# EAGLE board pcb_univ_3-2-(3-4)-x-rev1 (EAGLE 5.11)
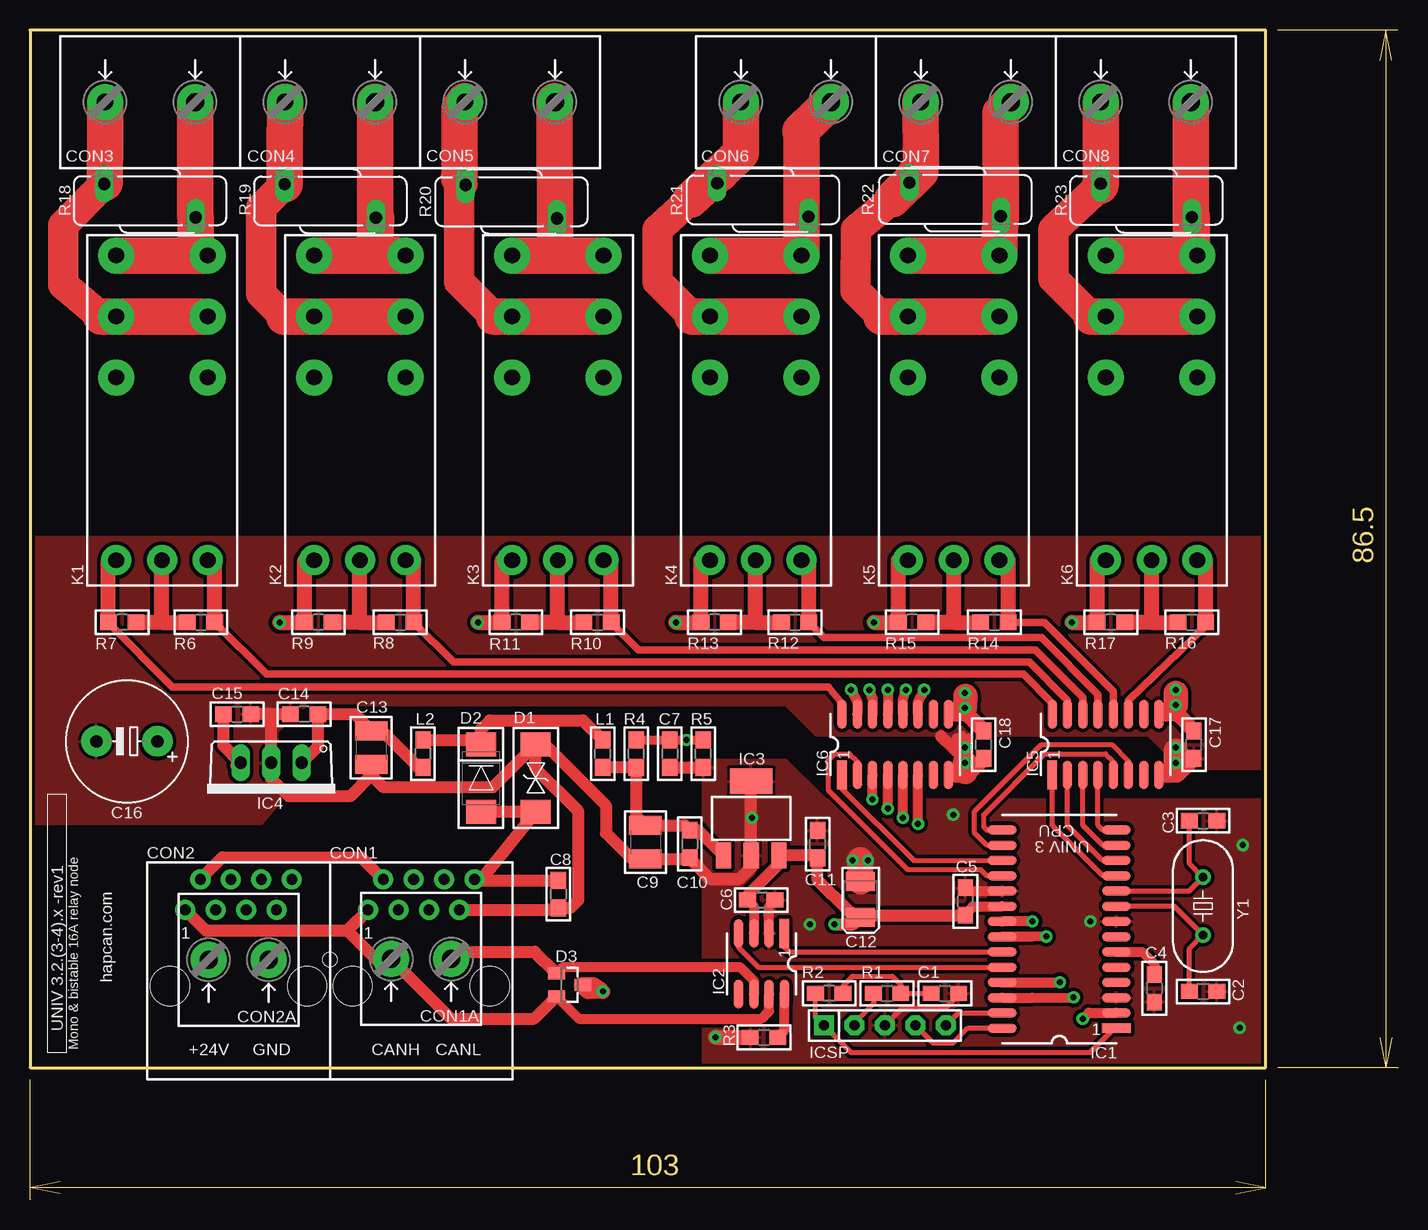
[diagram p0: board, top side]
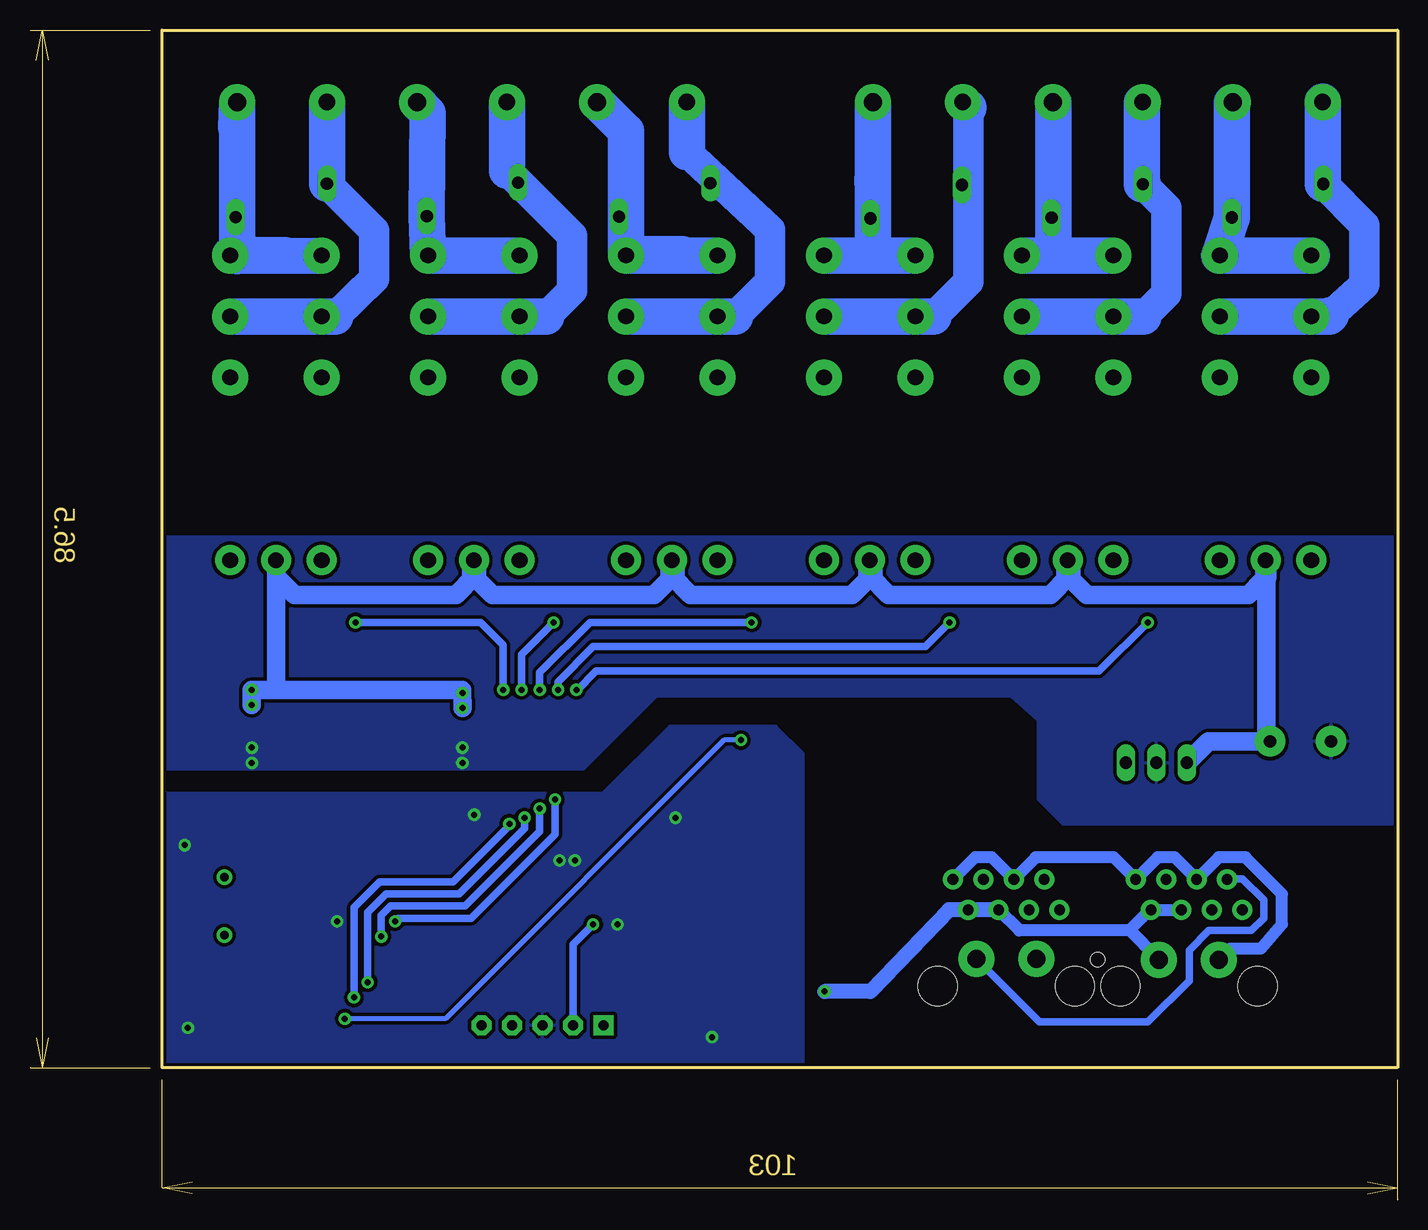
[diagram p1: board, bottom side, seen from below]

Size 114 x 97.5 mm. Coordinates in mm from the lower left corner, seen from the top.
Outline: 113.99,11 114,11 113,11
Outline: 113,11 104,11
Outline: 113,97.5 113,11
Outline: 114,97.5 113,97.5
Outline: 113,97.5 104,97.5
Outline: 113.5,95 113,97.5
Outline: 112.5,13.5 113,11
Outline: 113,97.5 112.5,95
Outline: 113.5,13.5 113,11
Outline: 0,0.01 0,0 0,1
Outline: 0,1 0,10
Outline: 103,1 0,1
Outline: 103,1 103,10
Outline: 100.5,0.5 103,1
Outline: 2.5,1.5 0,1
Outline: 103,1 100.5,1.5
Outline: 2.5,0.5 0,1
Outline: 0,11 103,11 103,97.5 0,97.5 0,11
Copper layers (1*16): Top 0.035mm / dielectric 1.5mm / Bottom 0.035mm
Design rules "hapcan_drc *": minimum track width 10mil, minimum drill 0.5mm, track to track 12mil, track to pad 12mil, pad to pad 12mil, via to via 12mil, smd to smd 10mil, copper to edge 10mil, drill to drill 8mil, minimum pad ring 10mil, minimum via ring 10mil, stop-mask expansion 4mil, vias tented up to drill 0mil, thermal gap 10mil
Holes 1.2 mm at 25,20
tKeepout: 4 lines

## Footprints (pad centres in the part's own frame; a part is rotated, then mirrored left to right if it is on the bottom)
0805 = smd 1.397 x 1.27: 1 -1.143,0; 2 1.143,0
1210 = smd 1.6 x 2.7: 1 -1.4,0; 2 1.4,0
SMC_B = smd 1.6 x 2.4: + -1.5,0; - 1.5,0
CAP-5X10.5 = drill 1.016 pad 2.54 round: + -2.54,0; - 2.54,0
RJ45-PCB-SOCKET = drill 0.889 pad 1.676 round: 1 -4.445,6.35; 2 -3.175,8.89; 3 -1.905,6.35; 4 -0.635,8.89; 5 0.635,6.35; 6 1.905,8.89; 7 3.175,6.35; 8 4.445,8.89 | hole 3.251: -5.715,0; 5.715,0
ARK2-5X10,5MM = drill 1.5 pad 3 round: 1 -2.5,0; 2 2.5,0
ARK2-7.5X10.5MM = drill 1.4 pad 3 round: 1 -3.75,0 | drill 1.5 pad 3 round: 2 3.75,0
DO-214_TRANSIL2@1 = smd 2 x 2.5: A 2.82,0; C -2.82,0
DO-214 = smd 2 x 2.5: A 2.82,0; C -2.82,0
SOT-23 = smd 1 x 1.4: 1 -0.95,-1.1; 2 0.95,-1.1; 3 0,1.1
UNIV3CPU = smd 2.4 x 0.8: 1 -4.763,8.255; 2 -4.763,6.985; 3 -4.763,5.715; 4 -4.763,4.445; 5 -4.763,3.175; 6 -4.763,1.905; 7 -4.763,0.635; 8 -4.763,-0.635; 9 -4.763,-1.905; 10 -4.763,-3.175; 11 -4.763,-4.445; 12 -4.763,-5.715; 13 -4.763,-6.985; 14 -4.763,-8.255; 15 4.763,-8.255; 16 4.763,-6.985; 17 4.763,-5.715; 18 4.763,-4.445; 19 4.763,-3.175; 20 4.763,-1.905; 21 4.763,-0.635; 22 4.763,0.635; 23 4.763,1.905; 24 4.763,3.175; 25 4.763,4.445; 26 4.763,5.715; 27 4.763,6.985; 28 4.763,8.255
SO-08 = smd 2.4 x 0.8: 1 -2.54,1.905; 2 -2.54,0.635; 3 -2.54,-0.635; 4 -2.54,-1.905; 5 2.54,-1.905; 6 2.54,-0.635; 7 2.54,0.635; 8 2.54,1.905
SOT-223 = smd 1.27 x 2.159: 1 -2.311,-3.099; 2 0,-3.099; 3 2.311,-3.099 | smd 3.556 x 2.159: 4 0,3.099
TO220V = drill 1.016 long: 1 -2.54,-2.54; 2 0,-2.54; 3 2.54,-2.54
SO-16 = smd 2.4 x 0.8: 1 -2.54,4.445; 2 -2.54,3.175; 3 -2.54,1.905; 4 -2.54,0.635; 5 -2.54,-0.635; 6 -2.54,-1.905; 7 -2.54,-3.175; 8 -2.54,-4.445; 9 2.54,-4.445; 10 2.54,-3.175; 11 2.54,-1.905; 12 2.54,-0.635; 13 2.54,0.635; 14 2.54,1.905; 15 2.54,3.175; 16 2.54,4.445
SIP-5 = drill 0.813 pad 1.676 square: 1 -5.08,0 | drill 0.813 pad 1.676 octagon: 2 -2.54,0; 3 0,0; 4 2.54,0; 5 5.08,0
RELAY_RT = drill 1.3 pad 3 round: 11A 7.62,3.81; 11B 7.62,-3.81; 12A 2.54,3.81; 12B 2.54,-3.81; 14A 12.7,3.81; 14B 12.7,-3.81 | drill 1.3 pad 2.5 round: A1 -12.7,-3.81; A2 -12.7,3.81; A3 -12.7,0
S10K = drill 1.016 long: 1 -1.397,-3.81; 2 1.397,3.81
HC49/S = drill 0.7 pad 1.27 round: 1 -2.413,0; 2 2.413,0

## Placement (x,y rotation side)
C1  100n  [0805]  76.27,17.19 0 top
C2  22p  [0805]  97.79,17.35 0 top
C3  22p  [0805]  97.79,31.57 0 top
C4  10u/6V  [0805]  93.73,17.6 270 top
C5  100n  [0805]  77.98,24.85 90 top
C6  100n  [0805]  60.96,24.97 0 top
C7  100n  [0805]  53.34,37.16 270 top
C8  100n  [0805]  44.04,25.47 270 top
C9  10u/50V  [1210]  51.31,29.8 270 top
C10  100n  [0805]  55,29.65 270 top
C11  100n  [0805]  65.66,29.62 90 top
C12  10u/6V  [SMC_B]  69.24,25.02 90 top
C13  10u/50V  [1210]  28.45,37.67 270 top
C14  100n  [0805]  22.86,40.46 180 top
C15  100n  [0805]  17.27,40.46 0 top
C16  1000u/16V  [CAP-5X10.5]  8.08,38.19 180 top
C17  100n  [0805]  97.03,37.92 90 top
C18  100n  [0805]  79.5,37.92 90 top
CON1  [RJ45-PCB-SOCKET]  32.62,17.8 0 top
CON1A  TERMINAL-2  [ARK2-5X10,5MM]  32.62,20.06 180 top
CON2  [RJ45-PCB-SOCKET]  17.38,17.8 0 top
CON2A  TERMINAL-2  [ARK2-5X10,5MM]  17.38,19.99 180 top
CON3  TERMINAL-2  [ARK2-7.5X10.5MM]  10,91.5 0 top
CON4  TERMINAL-2  [ARK2-7.5X10.5MM]  25,91.5 0 top
CON5  TERMINAL-2  [ARK2-7.5X10.5MM]  40,91.5 0 top
CON6  TERMINAL-2  [ARK2-7.5X10.5MM]  63,91.5 0 top
CON7  TERMINAL-2  [ARK2-7.5X10.5MM]  78,91.5 0 top
CON8  TERMINAL-2  [ARK2-7.5X10.5MM]  93,91.5 0 top
D1  P6SMB33CA  [DO-214_TRANSIL2@1]  42.16,35.13 270 top
D2  S1D  [DO-214]  37.59,35.13 270 top
D3  PESD2CAN  [SOT-23]  44.98,17.9 270 top
IC1  UNIV 3 (CPU)  [UNIV3CPU]  85.81,22.54 180 top
IC2  MCP2551  [SO-08]  60.98,19.66 270 top
IC3  MCP1790-5002EDB  [SOT-223]  60.12,31.77 0 top
IC4  7812  [TO220V]  20.09,33.87 180 top
IC5  ULN2003  [SO-16]  89.66,37.92 90 top
IC6  ULN2003  [SO-16]  72.14,37.92 90 top
ICSP  [SIP-5]  71.27,14.52 0 top
K1  [RELAY_RT]  11,66 90 top
K2  [RELAY_RT]  27.5,66 90 top
K3  [RELAY_RT]  44,66 90 top
K4  [RELAY_RT]  60.5,66 90 top
K5  [RELAY_RT]  77,66 90 top
K6  [RELAY_RT]  93.5,66 90 top
L1  BLM21A102SPT  [0805]  47.75,37.16 90 top
L2  BLM21A102SPT  [0805]  32.77,37.16 90 top
R1  10k  [0805]  71.45,17.19 0 top
R2  470R  [0805]  66.62,17.19 180 top
R3  4k7  [0805]  61.19,13.52 0 top
R4  51k 1%  [0805]  50.55,37.16 90 top
R5  10k 1%  [0805]  56.13,37.16 90 top
R6  75R  [0805]  14.26,48.12 0 top
R7  75R  [0805]  7.68,48.12 180 top
R8  75R  [0805]  30.85,48.12 0 top
R9  75R  [0805]  24.04,48.12 180 top
R10  75R  [0805]  47.31,48.12 0 top
R11  75R  [0805]  40.5,48.12 180 top
R12  75R  [0805]  63.78,48.12 0 top
R13  75R  [0805]  57.07,48.12 180 top
R14  75R  [0805]  80.4,48.12 0 top
R15  75R  [0805]  73.54,48.12 180 top
R16  75R  [0805]  96.86,48.12 0 top
R17  75R  [0805]  90.11,48.12 180 top
R18  VAR10-250  [S10K]  10,83.27 270 top
R19  VAR10-250  [S10K]  25.03,83.24 270 top
R20  VAR10-250  [S10K]  40.12,83.19 270 top
R21  VAR10-250  [S10K]  61.1,83.34 270 top
R22  VAR10-250  [S10K]  77.11,83.39 270 top
R23  VAR10-250  [S10K]  93.05,83.29 270 top
Y1  8MHz  [HC49/S]  97.79,24.46 90 top

## Library data of the parts
C1-C18 CON1 CON1A CON2 CON2A CON3-CON8 D1-D3 IC1-IC6 ICSP K1-K6 L1 L2 R1-R23 Y1 = HAPCAN_devices - UNIV3

## Nets
+5V: C5.1 C6.1 C11.1 C12.+ IC1.20 IC2.3 IC3.3 ICSP.2 R1.1
+12V: C15.1 C16.+ C17.2 C18.2 IC4.3 IC5.9 IC6.9 K1.A3 K2.A3 K3.A3 K4.A3 K5.A3 K6.A3 R6.1 R7.1 R8.1 R9.1 R10.1 R11.1 R12.1 R13.1 R14.1 R15.1 R16.1 R17.1
GND: C1.2 C2.2 C3.2 C4.2 C5.2 C6.2 C7.2 C8.2 C9.2 C10.2 C11.2 C12.- C13.2 C14.2 C15.2 C16.- C17.1 C18.1 CON1.5 CON1.7 CON2.5 CON2.7 CON2A.1 D1.C D3.3 IC1.3 IC1.8 IC1.19 IC2.2 IC3.2 IC3.4 IC4.2 IC5.8 IC6.8 ICSP.3 R3.1 R5.1
K1A1: IC5.16 K1.A1 R6.2
K1A2: IC6.16 K1.A2 R7.2
K2A1: IC5.15 K2.A1 R8.2
K2A2: IC6.15 K2.A2 R9.2
K3A1: IC5.14 K3.A1 R10.2
K3A2: IC6.14 K3.A2 R11.2
K4A1: IC5.13 K4.A1 R12.2
K4A2: IC6.13 K4.A2 R13.2
K5A1: IC5.12 K5.A1 R14.2
K5A2: IC6.12 K5.A2 R15.2
K6A1: IC5.11 K6.A1 R16.2
K6A2: IC6.11 K6.A2 R17.2
N$1: D2.C L1.2 L2.2
N$2: IC1.24 IC2.4
N$3: IC1.23 IC2.1
N$4: CON1.1 CON1A.2 CON2.1 D3.2 IC2.7
N$5: C9.1 C10.1 IC3.1 L1.1 R4.1
N$6: C13.1 C14.1 IC4.1 L2.1
N$7: C1.1 R1.2 R2.1
N$8: IC1.1 ICSP.1 R2.2
N$9: C8.1 CON1.4 CON1.8 CON2.4 CON2.8 CON2A.2 D1.A D2.A
N$10: IC1.28 ICSP.4
N$11: IC1.12 IC5.2
N$12: IC2.8 R3.2
N$14: IC1.27 ICSP.5
N$15: C3.1 IC1.10 Y1.2
N$16: C7.1 IC1.2 R4.2 R5.2
N$18: IC1.11 IC5.1
N$19: IC1.13 IC5.3
N$22: IC1.14 IC5.4
N$24: IC1.15 IC5.5
N$27: CON1.2 CON1A.1 CON2.2 D3.1 IC2.6
N$30: CON3.1 K1.11A K1.11B R18.1
N$32: CON3.2 K1.14A K1.14B R18.2
N$40: C2.1 IC1.9 Y1.1
N$45: IC1.16 IC5.6
N$46: IC1.17 IC6.1
N$47: IC1.18 IC6.2
N$51: CON4.2 K2.14A K2.14B R19.2
N$52: CON5.2 K3.14A K3.14B R20.2
N$53: CON6.2 K4.14A K4.14B R21.2
N$54: CON7.2 K5.14A K5.14B R22.2
N$55: CON8.2 K6.14A K6.14B R23.2
N$56: C4.1 IC1.6
N$57: CON4.1 K2.11A K2.11B R19.1
N$58: CON5.1 K3.11A K3.11B R20.1
N$59: CON6.1 K4.11A K4.11B R21.1
N$60: CON7.1 K5.11A K5.11B R22.1
N$61: CON8.1 K6.11A K6.11B R23.1
N$63: IC1.21 IC6.3
N$64: IC1.22 IC6.4
N$65: IC1.25 IC6.5
N$66: IC1.26 IC6.6

## Tracks (layer width: path | path; a pad name or v marks a point on that pad's centre or on a via)
+5V  (via drill 0.5 pad 1.02)
  Top 0.406: ICSP.2 68.73,14.7 70.36,16.33 70.36,17.13 R1.1
  Top 0.813: IC1.20 78.59,24.44 C5.1 | IC2.3 60.34,24.45 C6.1
  Top 1.016: C12.+ 69.81,23.71 C5.1 | C6.1 59.82,25.35 62.43,27.96 IC3.3 65.46,28.68 C11.1 65.66,26.62 68.26,24.02 C12.+ | C12.+ 68.66,22.94 v67.06,22.94
  Bottom 0.61: v67.06,22.94 68.73,21.27 ICSP.2
+12V  (via drill 0.5 pad 1.02)
  Top 0.61: 94.74,40.46 IC5.9 | 77.22,40.46 IC6.9 | 78.11,40.46 77.98,40.59 v77.95,40.97 | v95.5,41.23 95.5,40.46 | v77.95,42.24 77.95,42.01 77.98,41.99
  Top 1.016: IC4.3 16.13,37.84 C15.1
  Top 1.27: 10.92,48.12 R7.1 | 10.92,48.12 R6.1 | 27.43,48.12 R9.1 | 27.43,48.12 R8.1 | 43.94,48.12 R11.1 | 43.94,48.12 R10.1 | 60.45,48.12 R13.1 | 60.45,48.12 R12.1 | 76.96,48.12 R15.1 | 76.96,48.12 R14.1 | 93.47,48.12 R17.1 | 93.47,48.12 R16.1 | K6.A3 93.47,53.3 93.47,48.12 | K5.A3 76.96,53.3 76.96,48.12 | K4.A3 60.45,53.3 60.45,48.12 | K3.A3 43.94,53.3 43.94,48.12 | K2.A3 27.43,53.3 27.43,48.12 | K1.A3 10.92,53.3 10.92,48.12 | C17.2 95.63,40.46 95.5,40.46 94.74,40.46 | C18.2 78.11,40.46 77.22,40.46 | IC4.3 17.31,36.17
  Top 2.032: v95.5,41.23 95.5,42.24 | v77.95,40.97 77.98,41.99
  Bottom 1.27: 10.92,51.93 11.18,51.67
  Bottom 1.524: v77.95,40.97 77.98,42.5 91.44,42.5 | v95.5,42.5 v95.5,41.23 | 93.47,42.5 v95.5,42.5 | 93.47,53.27 93.47,51.93 91.95,50.4 78.49,50.4 76.96,51.93 75.44,50.4 61.98,50.4 60.45,51.93 58.93,50.4 45.47,50.4 43.94,51.93 42.42,50.4 28.96,50.4 27.43,51.93 25.91,50.4 12.45,50.4 11.18,51.67 11,51.85 | 93.47,42.5 93.5,42.52 K6.A3 93.5,53.42 | 93.47,42.5 93.47,42.53 | 93.47,42.53 93.47,42.75 93.22,42.5 91.44,42.5 | v95.5,42.5 93.47,42.53 | 93.47,42.53 91.44,42.5 | IC4.3 15.79,38.2 C16.+ 10.92,38.98 10.92,51.93
  Bottom 1.778: 11,51.85 K1.A3
  Bottom 2.032: 93.47,53.27 K6.A3 | 27.43,51.93 27.43,53.23 K2.A3 | 43.94,51.93 43.94,53.24 K3.A3 | 60.45,51.93 60.45,53.25 K4.A3 | 76.96,51.93 76.96,53.26 K5.A3
GND  (via drill 0.5 pad 1.02)
  Top 0.406: C1.2 77.42,17.04 76.33,15.95 72.7,15.95 ICSP.3 | v77.95,36.4 77.95,36.65 | 77.95,36.65 77.72,36.88 78.21,36.91 | 77.7,38.69 78.33,38.58 78.36,36.6 78.21,36.4 77.95,36.65
  Top 0.61: IC6.8 77.22,35.38 | IC5.8 94.74,35.38 | 78.11,35.38 77.98,35.51 77.98,35.64 | 95.63,35.38 95.25,35.77 95.5,36.15
  Top 0.813: IC1.19 78.39,25.71 C5.2 | IC2.2 61.61,24.48 C6.2 | 78.21,36.91 78.21,37.92 77.7,38.43 77.19,38.43 77.19,38.18 77.7,37.67 77.7,38.69
  Top 1.016: CON1.7 43.1,24.15 C8.2 45.07,24.32 45.72,24.97 45.72,32.34 42.16,35.89 D1.C | 57.17,13.52 v57.15,13.54 | IC3.4 IC3.2 60.2,28.59 60.2,27.76 59.18,26.75 56.64,26.75 55,28.39 C10.2 54.89,28.4 C9.2 | C9.2 51.18,28.53 | 20.07,40.46 C15.2 | 20.07,40.46 C14.2 | 20.07,40.46 20.09,40.44 IC4.2 20.09,35.1 21.59,33.61 26.67,33.61 28.45,35.38 | 28.45,35.38 29.46,34.37 38.58,34.37 D1.C | 28.45,35.38 C13.2 | D1.C 42.44,37.67 43.18,37.67 48.01,32.84 48.01,30.56 50.29,28.27 51.18,28.27 C9.2 | C7.2 R5.1 | 77.72,36.88 75.95,38.61
  Top 1.27: C18.1 78.11,35.38 77.22,35.38 | C17.1 95.63,35.38 94.74,35.38 | 57.17,13.52 R3.1 | D3.3 46.95,17.9 v47.75,17.35 46.48,17.35 45.97,17.86
  Top 2.032: 77.98,35.64 v77.95,36.4 | 95.5,36.15 v95.5,36.4 95.5,37.42
  Top 2.184: C12.- 69.22,27.05 69.22,28.27
  Bottom 1.016: 22.35,22.43 22.27,22.43 20.09,20.25 CON2A.1 | 22.35,22.43 31.54,22.43 CON1.5 CON1.7 | CON2.5 CON2.7 20.63,24.15 22.35,22.43
  Bottom 1.27: CON1.5 37.4,24.15 43.94,17.35 v47.75,17.35
  other vias: 95.5,37.67 65.02,22.94 76.96,32.08 68.58,28.27 69.85,28.27 101.09,29.54 100.84,14.3 60.2,31.83 88.39,23.19 77.95,37.67
  pour Top: 103,11 56.13,11.25 56.13,36.65 62.99,36.68 66.29,33.38 103,33.35
  pour Bottom: 103,11 49.53,11 49.53,37.19 51.79,39.45 60.71,39.45 66.29,33.86 103,33.86
  pour Top: 0,31.32 0,55.23 103,55.23 103,35.89 96.01,35.89 93.22,38.69 65.53,38.69 62.99,41.23 23.11,41.23 20.57,38.94 20.83,33.1 19.3,31.32
  pour Bottom: 103,36.7 103.02,35.89 67.82,35.89 61.72,41.99 32.26,41.99 29.97,39.96 29.97,33.35 27.94,31.32 0,31.32 0,55.23 103,55.23
K1A1
  Top 0.61: R6.2 19.72,43.8 82.8,43.8 85.22,41.35 IC5.16
  Top 1.27: K1.A1 15.4,53.3 R6.2
K1A2
  Top 0.61: R7.2 11.87,42.75 66.55,42.75 67.69,41.35 IC6.16
  Top 1.27: K1.A2 6.54,53.3 R7.2
K2A1
  Top 0.61: R8.2 35.3,44.81 83.31,44.81 86.49,41.61 IC5.15
  Top 1.27: K2.A1 31.99,53.3 R8.2
K2A2  (via drill 0.5 pad 1.02)
  Top 0.813: IC6.15 68.96,41.48 v68.45,42.5
  Top 1.27: K2.A2 22.9,53.3 R9.2 v20.83,48.12
  Bottom 0.61: v68.45,42.5 68.45,42.4 66.8,44.05 24.89,44.05 v20.83,48.12
K3A1
  Top 0.61: R10.2 50.74,45.83 83.82,45.83 87.76,41.86 IC5.14
  Top 1.27: K3.A1 48.45,53.3 R10.2
K3A2  (via drill 0.5 pad 1.02)
  Top 0.813: IC6.14 70.23,41.73 v69.98,42.5
  Top 1.27: K3.A2 39.36,53.3 R11.2 v37.34,48.12
  Bottom 0.61: v69.98,42.5 69.98,43.16 67.06,46.08 39.37,46.08 v37.34,48.12
K4A1
  Top 0.61: R12.2 66.2,46.85 84.33,46.85 89.03,42.11 IC5.13
  Top 1.27: K4.A1 64.93,53.3 R12.2
K4A2  (via drill 0.5 pad 1.02)
  Top 0.813: v71.5,42.5 IC6.13
  Top 1.27: K4.A2 55.93,53.3 R13.2 v53.85,48.12
  Bottom 0.61: v71.5,42.5 71.5,43.92 67.31,48.12 v53.85,48.12
K5A1
  Top 0.61: R14.2 84.58,48.12 90.3,42.37 IC5.12
  Top 1.27: K5.A1 81.54,53.3 R14.2
K5A2  (via drill 0.5 pad 1.02)
  Top 0.813: IC6.12 72.77,41.73 v73.03,42.5
  Top 1.27: K5.A2 72.39,53.3 R15.2 v70.36,48.12
  Bottom 0.61: v73.03,42.5 73.03,45.45 v70.36,48.12
K6A1
  Top 0.61: IC5.11 91.57,41.61 98,47.82 R16.2
  Top 1.27: K6.A1 98,53.3 R16.2
K6A2  (via drill 0.5 pad 1.02)
  Top 0.813: IC6.11 74.04,41.48 v74.55,42.5
  Top 1.27: K6.A2 88.97,53.3 R17.2 v86.87,48.12
  Bottom 0.61: v74.55,42.5 74.55,46.21 76.45,48.12 v86.87,48.12
N$1
  Top 1.016: L2.2 37.24,38.3 D2.C 37.59,39.19 38.35,39.96 46.1,39.96 L1.2
N$2
  Top 0.406: IC1.24 60.73,19.36 59.07,21.02 IC2.4
N$3
  Top 0.406: IC1.23 63.27,20.63 62.74,21.16 62.74,22.05 IC2.1
N$4
  Top 0.813: IC2.7 61.61,15.71 60.96,15.06 45.77,15.06 D3.2
  Top 1.016: D3.2 42,15.06 35.11,15.06 CON1A.2 28.83,20.06 26.45,22.43 | 26.45,22.43 CON1.1 | 26.45,22.43 14.65,22.43 CON2.1
N$5
  Top 1.016: L1.1 R4.1 50.55,31.96 C9.1 54.6,31.2 C10.1 55.69,30.8 IC3.1
N$6
  Top 1.016: 24,40.34 C14.1 | IC4.1 24,37.78 24,40.34 | L2.1 32.39,36.02 29.46,38.94 28.58,38.94 C13.1 27.05,40.46 23.88,40.46 24,40.34
N$7
  Top 0.406: C1.1 R1.2 72.59,17.91 71.88,18.62 68.58,18.62 67.82,17.86 67.82,17.25 R2.1
N$8
  Top 0.406: IC1.1 90.44,14.28 90.42,14.3 88.39,12.27 68.44,12.27 ICSP.1 65.48,15.23 R2.2
N$9
  Top 1.016: C8.1 37.15,26.61 CON1.8 37.82,26.94 D1.A D2.A
  Bottom 1.016: CON1.8 35.23,28.53 33.82,28.53 CON1.4 30.15,28.53 23.66,28.53 CON2.8 19.99,28.53 18.58,28.53 CON2.4 14.91,28.53 12.68,28.53 9.63,25.48 9.63,22.94 11.41,20.91 13.97,20.91 CON2A.2
N$10
  Top 0.406: IC1.28 81.03,14.3 78.21,14.3 76.96,13.06 75.27,13.06 ICSP.4
N$11
  Top 0.406: IC5.2 86.49,31.19 89.41,28.27 90.56,28.27 IC1.12
N$12
  Top 0.813: IC2.8 62.88,14.07 R3.2
N$14
  Top 0.406: IC1.27 77.38,15.55 ICSP.5
N$15
  Top 0.406: IC1.10 96.63,25.71 Y1.2 96.65,28.02 C3.1
N$16  (via drill 0.5 pad 1.02)
  Top 0.406: 90.56,15.57 IC1.2
  Top 0.762: R5.2 v54.74,38.3 C7.1 R4.2
  Top 0.813: 90.56,15.57 88.27,15.57 v87.76,15.06
  Bottom 0.406: v87.76,15.06 79.38,15.06 R5.2 v54.74,38.3
N$18
  Top 0.406: IC5.1 85.22,31.19 89.41,27 90.56,27 IC1.11
N$19
  Top 0.406: IC5.3 87.76,31.19 89.41,29.54 90.56,29.54 IC1.13
N$22
  Top 0.406: IC5.4 89.03,31.19 89.41,30.81 90.56,30.81 IC1.14
N$24
  Top 0.406: IC5.5 90.3,36.53 89.66,37.16 84.58,37.16 79.5,32.08 79.5,31.07 79.76,30.81 81.03,30.81 IC1.15
N$27
  Top 0.813: IC2.6 60.34,18.22 59.18,19.38 44.42,19.38 D3.1
  Top 1.016: D3.1 42.08,20.65 35.72,20.65 CON1A.1 | CON2.2 16.04,28.53 27.61,28.53 CON1.2
  Bottom 0.61: CON1A.1 29.87,14.81 20.8,14.81 17.38,18.24 17.38,20.78 15.72,22.43 12.17,22.43 11.15,23.45 11.15,24.97 12.93,26.75 14.15,26.75 CON2.2
N$30
  Top 2.54: R18.1 2.77,81.25 2.77,76.28 5.94,73.62
  Top 3.048: K1.11B K1.11A 5.94,73.62 | CON3.1 6.25,88.55 6.22,84.76
  Bottom 2.54: R18.1 2.77,81.25 2.77,76.28 5.56,73.74
  Bottom 3.048: 5.56,73.74 5.7,73.62 K1.11B | 6.25,88.29 6.25,84.67 R18.1 | 6.25,88.29 6.25,91.52 | 6.25,88.29 CON3.1
N$32
  Top 3.048: K1.14A K1.14B 13.79,78.84 R18.2 13.75,81.93 CON3.2
  Bottom 3.048: 7.14,78.69 14.84,78.69 R18.2 13.81,91.44
N$40
  Top 0.406: IC1.9 95.4,24.44 Y1.1 96.65,20.91 C2.1
N$45
  Top 0.406: IC5.6 91.57,36.53 90.17,37.92 84.33,37.92 78.74,32.34 78.74,30.56 79.78,29.52 IC1.16
N$46
  Top 0.406: IC1.17 73.68,28.25 67.69,34.24 IC6.1
N$47
  Top 0.406: IC1.18 79.78,26.98 79.25,27.51 73.15,27.51 66.55,34.11 66.55,36.65 67.06,37.16 68.33,37.16 68.96,36.53 IC6.2
N$51
  Top 3.048: K2.14A K2.14B 28.77,78.86 R19.2 28.79,79.89 28.78,91.52
  Bottom 0.61: R19.2 28.84,83.74 28.68,83.9
  Bottom 3.048: CON4.2 28.68,91.43 28.68,83.9 28.68,79.21 | K2.14A K2.14B
N$52
  Top 2.54: 44,78.68 R20.2 43.78,79.64
  Top 3.048: K3.14A K3.14B 44,78.68 | 43.78,79.64 43.74,91.54
  Bottom 0.61: R20.2 43.93,78.72 43.92,78.7 | 43.75,78.67 43.69,78.67 43.66,78.7
  Bottom 3.048: 43.75,85.84 CON5.2 | 43.75,85.84 43.79,84.79 | 43.75,78.67 43.75,85.84 | K3.14B 43.92,78.7 43.66,78.7 43.27,78.7 43.16,78.82 43.04,78.7 K3.14A
N$53
  Top 0.762: 64.49,82.88 64.67,81.69 R21.2 64.16,81.69
  Top 2.54: 64.31,88.96 64.49,82.88 | 64.16,81.69 64.24,82.63 64.22,89.06
  Top 3.048: K4.14A K4.14B 64.31,88.96 | 64.22,89.06 66.75,91.52
  Bottom 3.048: CON6.2 64.31,89.06 K4.14B | K4.14B 64.19,78.82 59.67,78.82 | K4.14A K4.14B
N$54
  Top 3.048: K5.14A K5.14B 80.81,80.1 R22.2 80.88,90.57 81.76,91.52
  Bottom 3.048: K5.14A 80.8,78.69 R22.2 80.87,90.57 CON7.2
N$55
  Top 3.048: K6.14A K6.14B 96.86,79.15 R23.2 96.79,79.59 CON8.2
  Bottom 3.048: 96.8,89.42 CON8.2 96.75,78.65 K6.14A | K6.14B 97.29,78.72 92.79,78.72
N$56
  Top 0.813: IC1.6 92.73,20.63 93.73,19.64 C4.1
N$57
  Top 2.54: 21.18,73.62 19.28,75.52 19.28,82.7 R19.1
  Top 3.048: K2.11B K2.11A 21.18,73.62 | R19.1 21.22,87.36 21.26,91.52
  Bottom 2.54: R19.1 19.28,82.7 19.28,75.52 21.18,73.62
  Bottom 3.048: CON4.1 21.31,91.44 21.31,84.64 R19.1 | 21.18,73.62 K2.11B
N$58
  Top 1.778: R20.1 35.79,85.17
  Top 2.032: 35.79,84.31 R20.1
  Top 2.54: 38.7,73.62 35.79,76.53 35.79,84.31
  Top 3.048: K3.11B K3.11A 38.7,73.62 | 35.79,85.17 35.81,85.68 35.81,90.99 36.22,91.54
  Bottom 2.54: 35.79,91.04 35.79,76.53 38.7,73.62
  Bottom 3.048: 35.79,91.04 CON5.1 | 38.7,73.62 K3.11B
N$59
  Top 1.27: 57.54,85.52 R21.1 57.54,85.77 57.63,85.68
  Top 2.54: 55.21,73.62 52.3,76.53 52.3,80.85 55.04,83.34
  Top 3.048: K4.11B K4.11A 55.21,73.62 | 55.04,83.34 59.04,87.02 57.89,85.93 57.54,85.52 | 57.63,85.68 59.27,87.28 59.28,91.49
  Bottom 2.54: 59.25,87.29 52.3,80.85 52.3,76.53 55.21,73.62
  Bottom 3.048: 59.25,87.29 CON6.1 | K4.11B 55.21,73.62
N$60
  Top 2.54: 70.96,73.62 68.81,75.77 68.83,80.85 71.88,83.39
  Top 3.048: K5.11B K5.11A 70.96,73.62 | 71.88,83.39 74.25,85.7 R22.1 74.27,86.29 74.25,91.52
  Bottom 2.54: 74.25,85.78 68.81,80.34 68.81,75.77 70.96,73.62
  Bottom 3.048: 74.25,85.78 CON7.1 | 70.96,73.62 K5.11B
N$61
  Top 2.54: 89.24,84.52 85.32,80.85 85.32,76.79 88.49,73.62
  Top 3.048: K6.11B K6.11A 88.49,73.62 | 89.24,84.52 R23.1 89.26,84.72 89.26,91.52
  Bottom 2.54: R23.1 85.32,80.76 85.32,76.79 88.55,73.61
  Bottom 3.048: CON8.1 89.23,91.48 R23.1 | 88.55,73.61 97.29,73.61 K6.11A
N$63  (via drill 0.5 pad 1.02)
  Top 0.813: IC1.21 83.55,23.17 v83.57,23.19 | v70.23,33.35 IC6.3
  Bottom 0.61: v70.23,33.35 70.23,30.43 77.22,23.45 83.31,23.45 v83.57,23.19
N$64  (via drill 0.5 pad 1.02)
  Top 0.813: IC1.22 83.55,21.9 v84.71,21.92 | v71.5,32.59 IC6.4
  Bottom 0.61: v71.5,32.59 71.5,30.68 77.72,24.46 83.95,24.46 84.71,23.7 v84.71,21.92
N$65  (via drill 0.5 pad 1.02)
  Top 0.813: IC1.25 83.55,18.09 v85.85,18.11 | v72.77,31.83 IC6.5
  Bottom 0.61: v72.77,31.83 72.77,30.94 78.23,25.48 84.33,25.48 85.85,23.95 v85.85,18.11
N$66  (via drill 0.5 pad 1.02)
  Top 0.813: IC1.26 83.55,16.82 v87,16.84 | v74.04,31.32 IC6.6
  Bottom 0.61: v74.04,31.32 74.04,31.19 78.74,26.49 84.84,26.49 87,24.34 v87,16.84

## Text on the board
Dimension: 86.5 | 103
tPlace: hapcan.com | UNIV 3.2.(3-4).x -rev1 | Mono & bistable 16A relay node | +24V | GND | CANH | CANL